# Altium PCB PCB1.PcbDoc
Units mm, origin at the board's own origin, x right, y up, seen from the top; angles counter-clockwise.
Board outline 152.4 x 101.6 mm, 4 copper layers (Top Layer, GND, PWR, Bottom Layer), stack 1.922 mm thick; 32 components, 37 nets, 142 pads, 49 vias.
Unrouted connection lines stored in the file: 17.
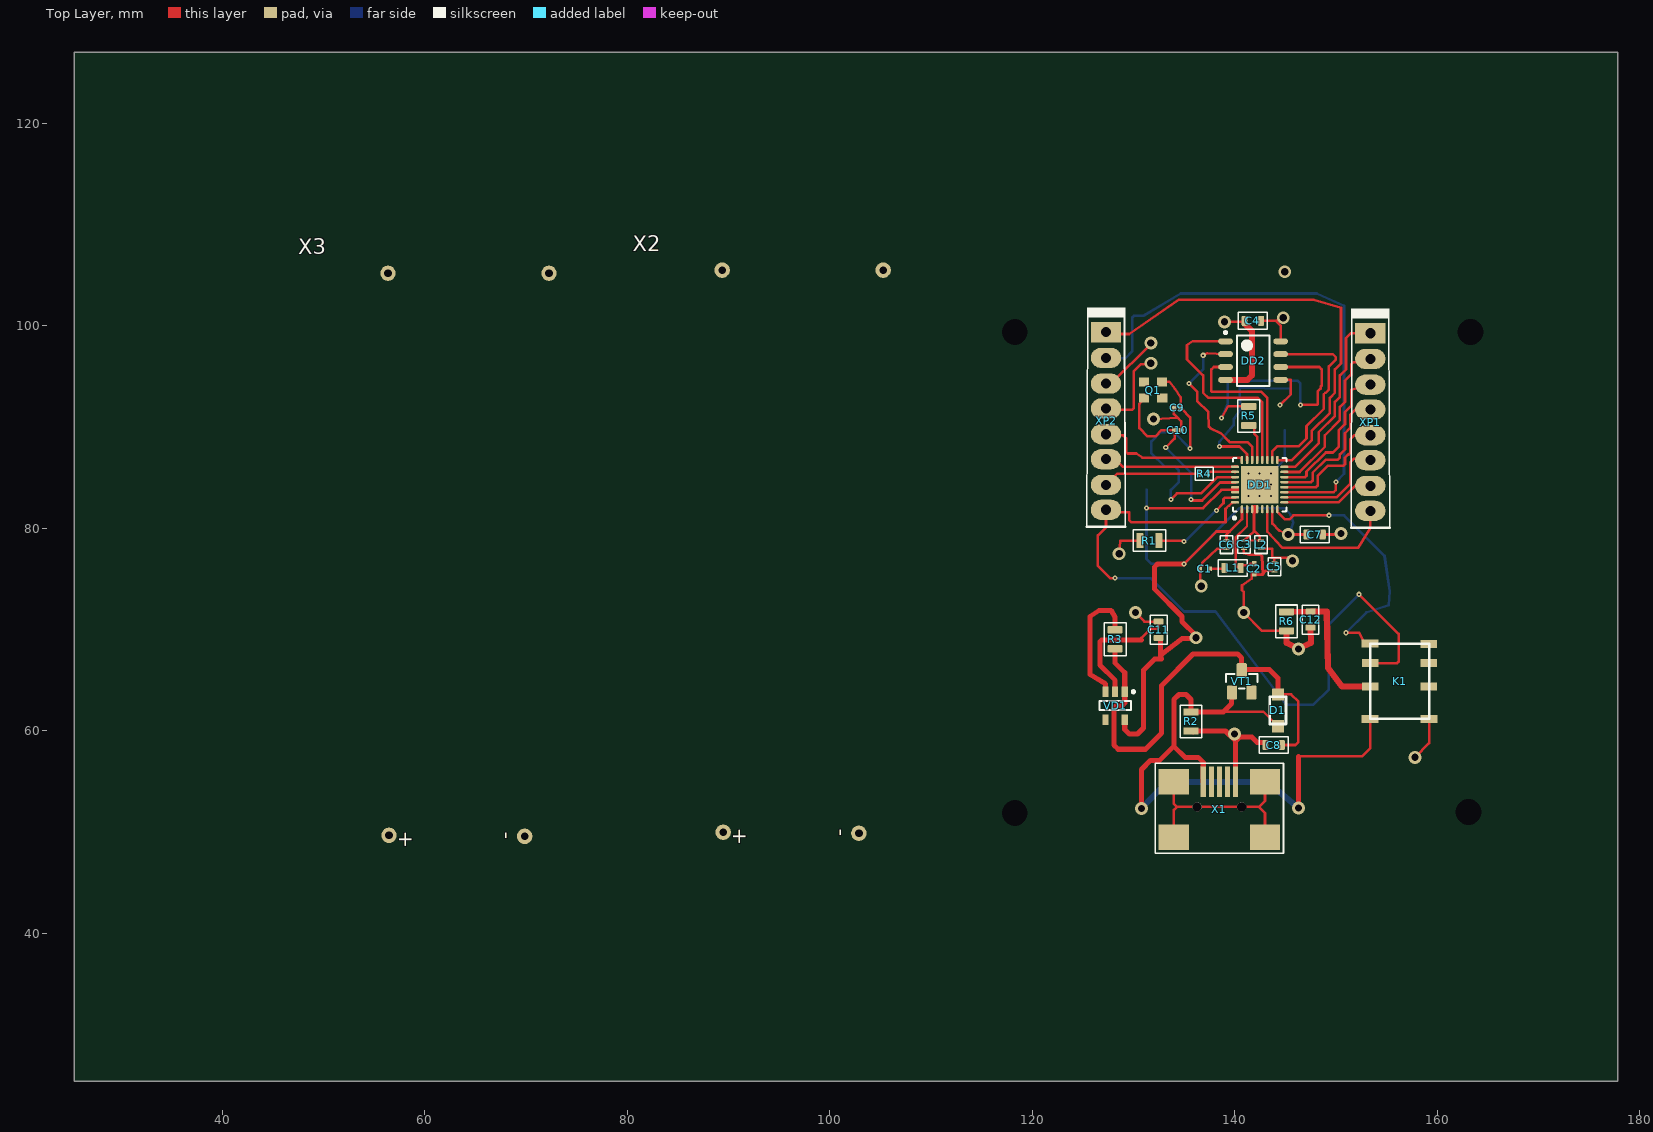
[diagram p0: Top Layer view]
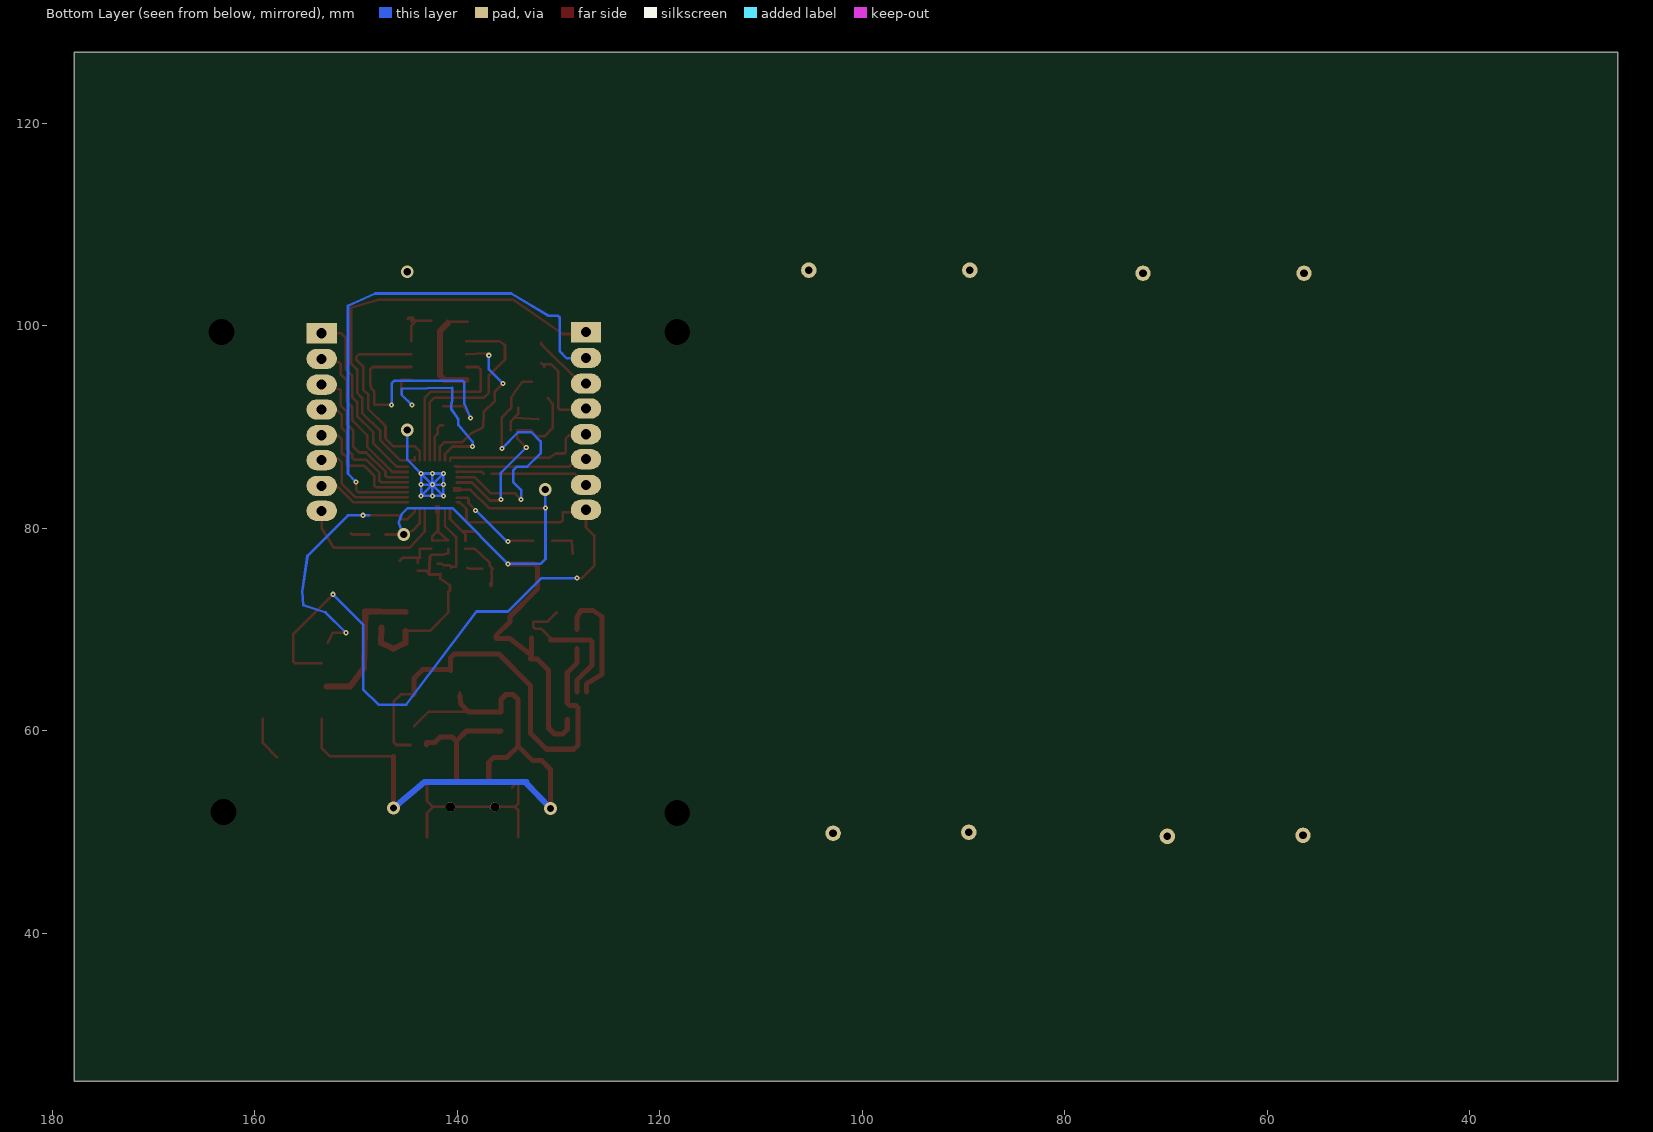
[diagram p1: Bottom Layer view, seen from below]
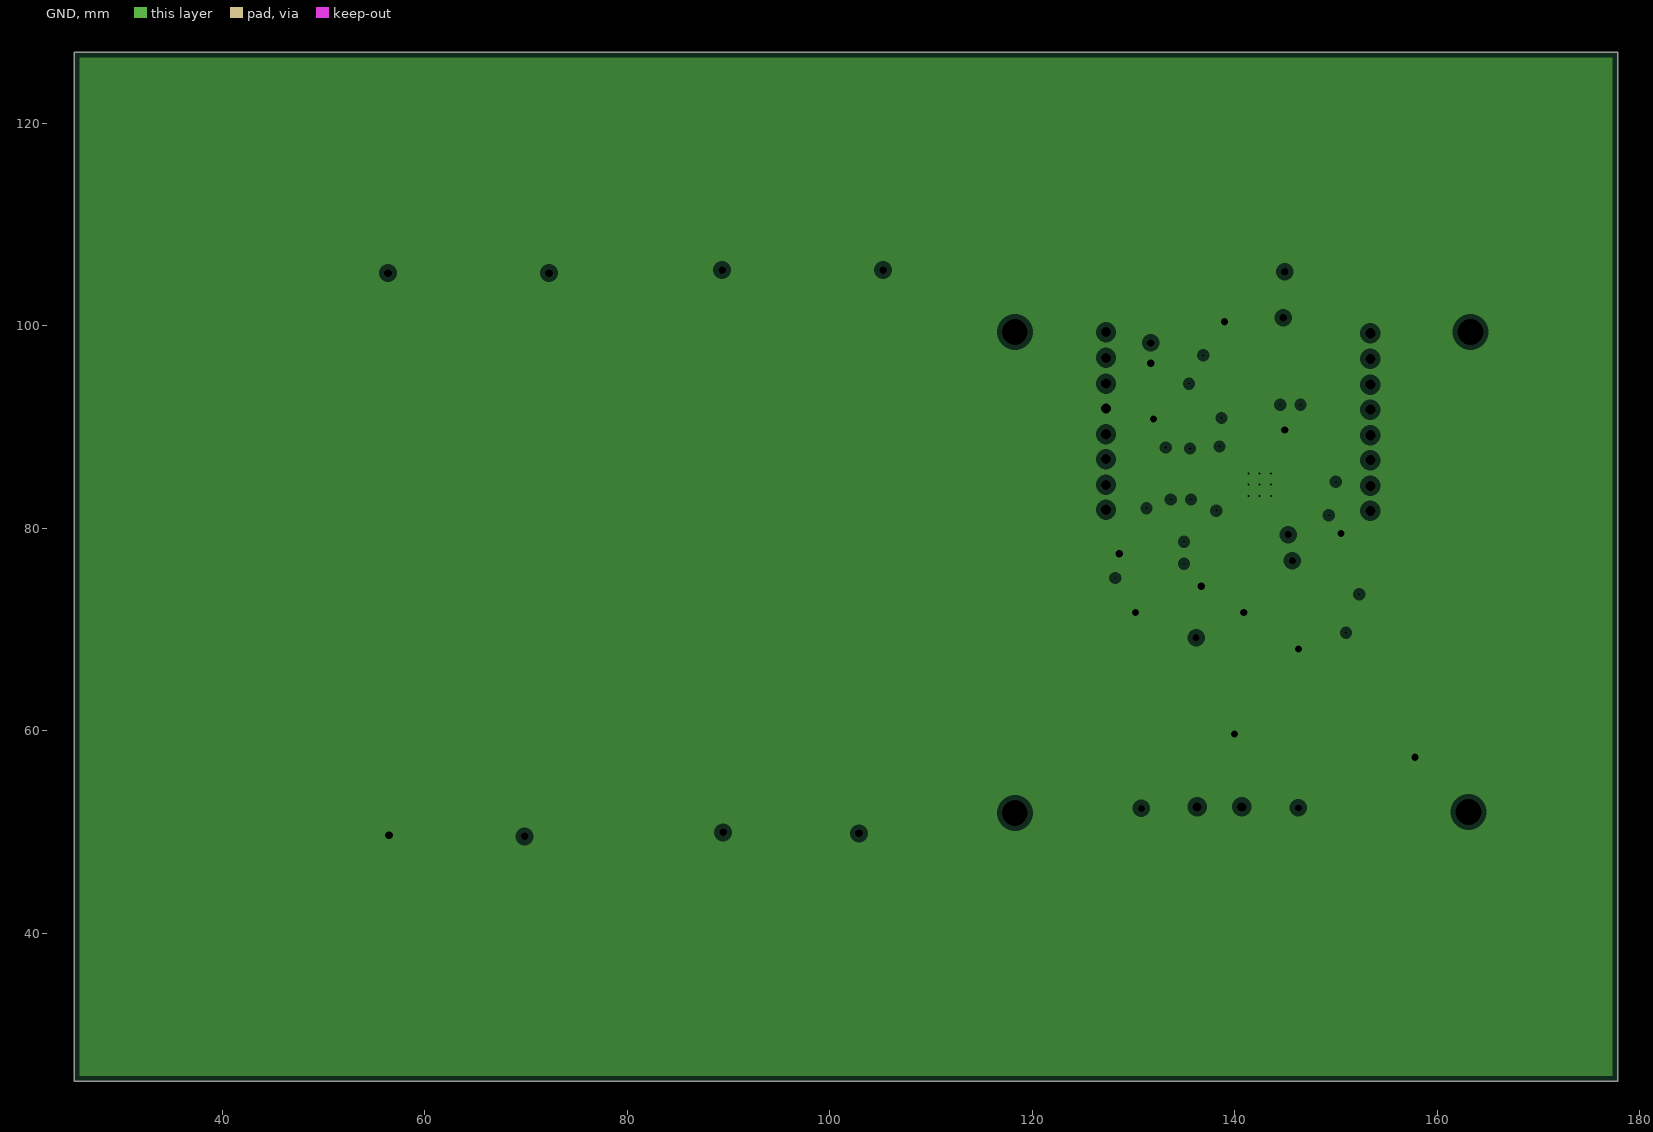
[diagram p2: GND, clearances drawn from the general rule]
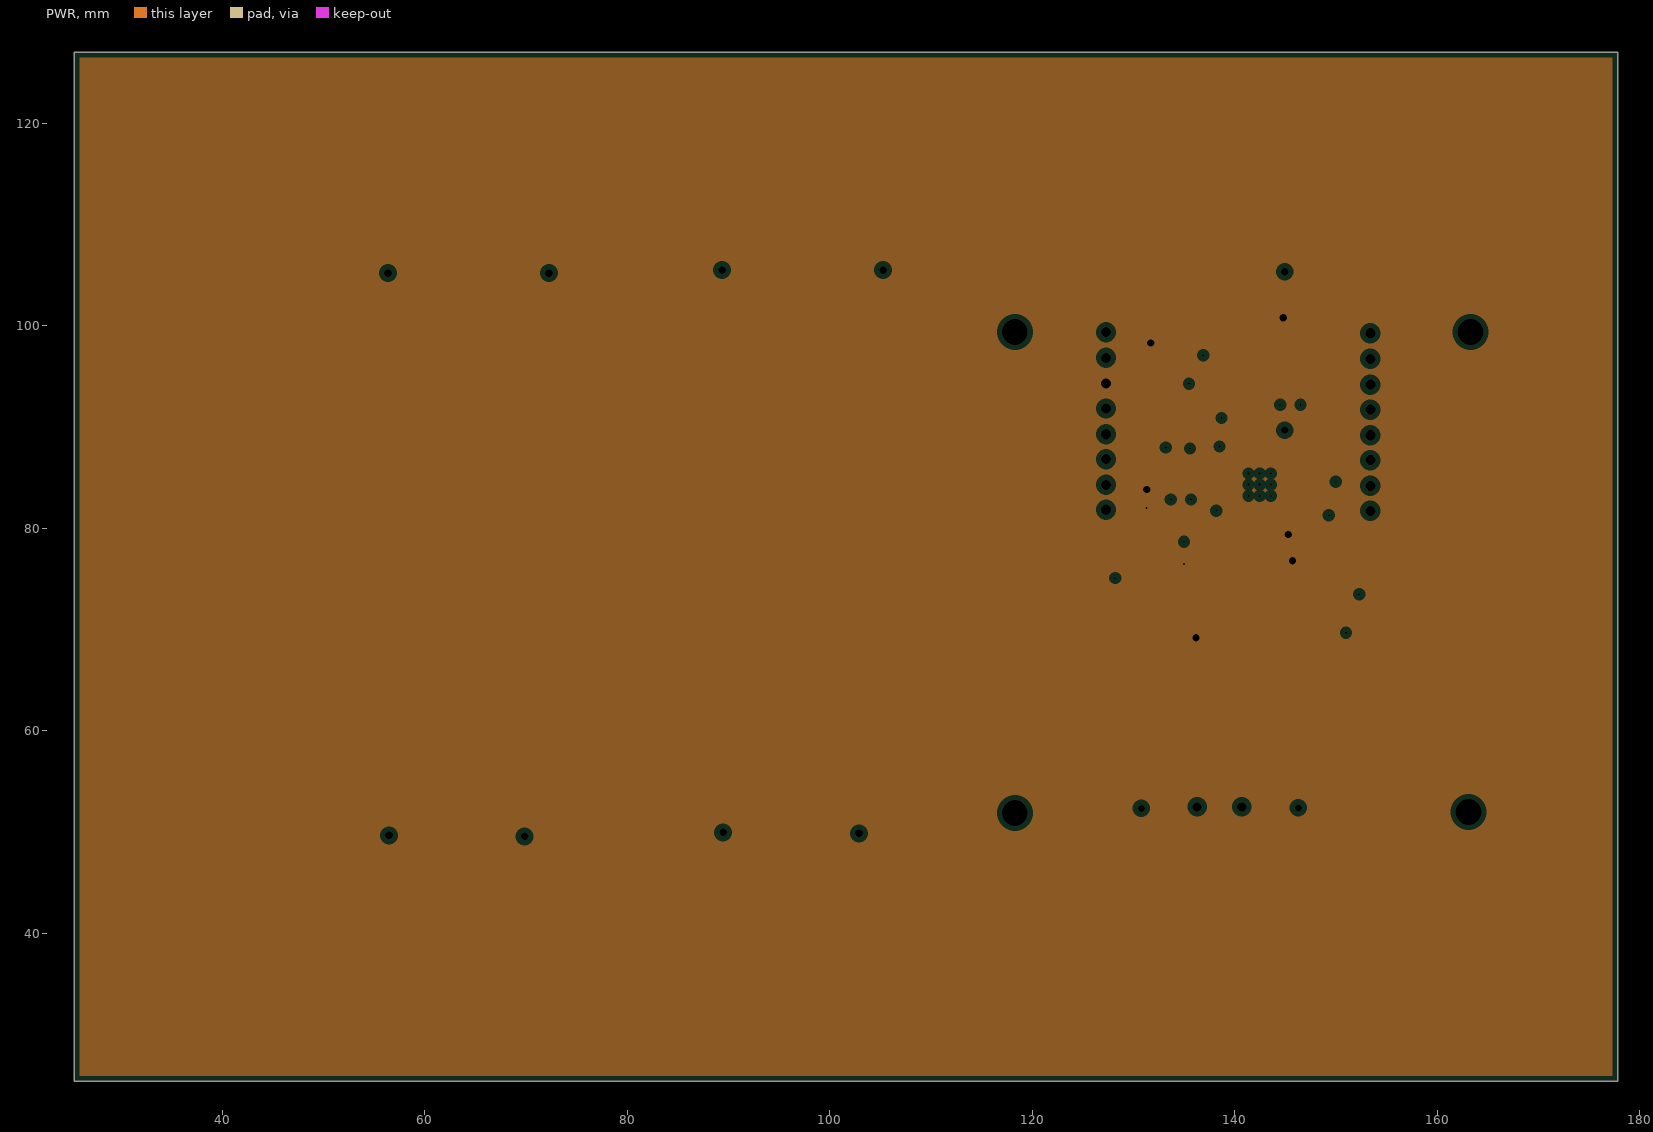
[diagram p3: PWR, clearances drawn from the general rule]

## Layer stack, top to bottom
Top Solder: solder mask 0.0254, SM-001, Dk 4
Top Layer: signal copper 0.105
Dielectric 2: prepreg 0.0711, PP-006, Dk 4.1
GND: plane copper 0.035, net GND
Dielectric 1: dielectric 1.5, FR-4, Dk 4.8
PWR: plane copper 0.035, net 3,3B
Dielectric 3: prepreg 0.0711, PP-006, Dk 4.1
Bottom Layer: signal copper 0.105
Bottom Solder: solder mask 0.0254, SM-001, Dk 4

## Board outline
25.4,25.4 177.8,25.4 177.8,127 25.4,127

## Design rules (kind name [scope] priority, off if disabled: settings)
Clearance [All] p1: gap=0.05 ignorepadtopadclearanceinfootprint=TRUE
DiffPairsRouting [All] p1: maxlimit=0.254 minlimit=0.1 mostfreqgap=0.254 toplayer_prefgap=0.1 toplayer_minwidth=0.25 toplayer_maxwidth=0.381 toplayer_prefwidth=0.25 bottomlayer_minwidth=0.25 bottomlayer_maxwidth=0.381 bottomlayer_prefwidth=0.25 maxuncoupledlength=12.7
HoleToHoleClearance [All] p1: gap=0.127 allowstackedmicrovias=TRUE
MinimumSolderMaskSliver [All] p1: minsoldermaskwidth=0.05
PlaneClearance [All] p1 off: clearance=0.508
PlaneConnect [All] p1 off: planeconnectstyle=Relief reliefexpansion=0.508 reliefentries=4 reliefconductorwidth=0.254 reliefairgap=0.254
PolygonConnect [All] p1 off: connectstyle=Relief reliefconductorwidth=0.254 reliefentries=4 polygonreliefangle="90 Angle" airgapwidth=0.254
RoutingVias [All] p1 off: holewidth=0.711 width=1.27 viastyle="Through Hole" minholewidth=0.711 minwidth=1.27 maxholewidth=0.711 maxwidth=1.27
ShortCircuit [All] p1: allowed=TRUE
SilkToSilkClearance [All] p1: silktosilkclearance=0.1
SilkToSolderMaskClearance [IsText] p1: minsilkscreentomaskgap=0.1 clearancetoexposedcopper=TRUE
SolderMaskExpansion [All] p1: expansion=0.05 istentingtop=FALSE soldermaskfromhole=TRUE
UnRoutedNet [All] p1: checkbadconnections=TRUE
Width [All] p1: maxlimit=0.6 minlimit=0.1 preferedwidth=0.25 minimp=50.000000 maximp=50.000000 favimp=50.000000
21 further rules are at their usual default settings.

## Classes and differential pairs
differential pair UART: +UART_P -UART_N

## Components (designator, comment, footprint, x,y, rotation, side; value= is the part's Value field where it differs from the comment)
C1 "3пФ" "0201 C0G 7пФ 25В"#1 137,76 r180 top
C4 "10мкФ" "FB 0603" 141.774,100.484 r0 top
C5 "0,1мкФ" "RES 0402"#1 143.9,76.2 r270 top
C6 "100нФ" "RES 0402"#2 139.174,78.384 r270 top
C8 "10мкФ" "FB 0603" 143.825,58.6 r0 top
C9 "7пкФ" "0201 C0G 7пФ 25В"#2 134.304,91.884 r0 top
C10 "7пкФ" "0201 C0G 7пФ 25В"#2 134.374,89.684 r180 top
D1 "" MBR120 143.65,64.125 r270 top
DD1 "esp8266ex" ESP8266 142.449,84.309 r90 top
DD2 "M25P16-VMN6TP" SOIC-8(3.90мм) 141.799,96.559 r0 top
K1 "gost relay" RELE 159.174,61.184 r90 top
L1 "2,2нГ" "FB 0603" 139.774,76.084 r0 top
L2 "4,3нГ" "RES 0402"#1 142.574,78.384 r270 top
Q1 "26МГц" SMD02520C4 131.925,93.6 r0 top
R1 "12k" "RES 0805" 131.574,78.784 r180 top
R2 "10k" "RES 0805" 135.674,60.934 r270 top
R3 "2K" "RES 0805" 128.174,69.059 r270 top
R4 "499К" "RES 0402"#1 136.974,85.384 r180 top
R5 "200Ом" "RES 0805" 141.374,91.084 r90 top
R6 "2K" "RES 0805" 145.1,70.8 r90 top
VD1 "ap2112" 2112 128.174,62.484 r270 top
VT1 "" SOT23-3 140.674,64.984 r0 top
X1 "usb_micro" USB_mini_B 138.474,46.584 r180 top
X2 "battery_x2" Battery_x2AA 89.374,105.484 r270 top
X3 "battery_x2" Battery_x2AA 56.374,105.184 r270 top
XP1 "PLD-8" PLD-8 153.374,86.724 r270 top
XP2 "PLD-8" PLD-8 127.274,86.824 r270 top
С2 "2,4пФ" "0201 C0G 7пФ 25В"#1 141.9,76 r270 top
С3 "0,1мкФ" "RES 0402"#3 140.9,78.4 r270 top
С7 "1мкФ" "FB 0603" 147.874,79.384 r0 top
С11 "10мкФ" "FB 0603" 132.474,69.984 r270 top
С12 "10мкФ" "FB 0603" 147.474,70.984 r90 top

## Footprints (in the part's own frame and the unit in brackets; to place one, negate y for a bottom-side part, rotate by r counter-clockwise, add the part's x,y. Pads: shape width x height; smd on the part's side, far side on the other; paste and mask are expansions set on the pad)
"0201 C0G 7пФ 25В"#1 [mm] "Chip Capacitor, 2-Leads, Body 0,60x0,30mm, IPC Medium Density"
  rect 0.5x0.44 smd: 1(-0.5,0) 2(0.5,0)
  body extent -0.3,-0.15 0.3,0.15, height 0.23
"0201 C0G 7пФ 25В"#2 [mm] "Chip Capacitor, 2-Leads, Body 0,60x0,30mm, IPC Medium Density"
  rect 0.5x0.44 smd: 1(-0.33,0) 2(0.33,0)
  body extent -0.3,-0.15 0.3,0.15, height 0.23
2112 [mm] "SOT23, 5-Leads, Body 3,00x2,85mm, Pitch 0,95mm, IPC Medium Density"
  rect 1.05x0.6 smd: 1(-1.375,0.95) 2(-1.375,0) 3(-1.375,-0.95) 4(1.375,-0.95) 5(1.375,0.95)
  silkscreen extent -1.5,-1.55 0.45,1.93, body extent -0.85,-1.55 0.85,1.55, height 1.1
Battery_x2AA [mil]
  round 60 hole 30: 1(2188.98,531.5) 2(2185.04,3.94) 99(0,625.98) 99(0,0)
  body extent -43,-358 2232,882, height 630
ESP8266 [mm] "QFN, 32-Leads, Body 5,00x5,00mm, Pitch 0,50mm, Thermal Pad 3,70x3,70mm, IPC Medium Density"
  oval 0.8x0.25 smd: 1(-2.425,1.75) 2(-2.425,1.25) 3(-2.425,0.75) 4(-2.425,0.25) 5(-2.425,-0.25) 6(-2.425,-0.75) 7(-2.425,-1.25) 8(-2.425,-1.75) 17(2.425,-1.75) 18(2.425,-1.25) 19(2.425,-0.75) 20(2.425,-0.25) 21(2.425,0.25) 22(2.425,0.75) 23(2.425,1.25) 24(2.425,1.75)
  oval 0.25x0.8 smd: 9(-1.75,-2.425) 10(-1.25,-2.425) 11(-0.75,-2.425) 12(-0.25,-2.425) 13(0.25,-2.425) 14(0.75,-2.425) 15(1.25,-2.425) 16(1.75,-2.425) 25(1.75,2.425) 26(1.25,2.425) 27(0.75,2.425) 28(0.25,2.425) 29(-0.25,2.425) 30(-0.75,2.425) 31(-1.25,2.425) 32(-1.75,2.425)
  rect 3.7x3.7 smd: 33(0,0)
  silkscreen extent -3.42,-2.65 2.65,2.65, body extent -2.5,-2.5 2.5,2.5, height 0.7
"FB 0603" [mm]
  rrect35% 0.6x1 smd: 1(-0.8,0) 2(0.8,0)
  silkscreen extent -1.43,-0.82 1.43,0.82, body extent -0.8,-0.43 0.8,0.43, height 0.9
MBR120 [mm]
  rect 1.2x1.2 smd: 1(0.525,0.6) 2(3.675,0.6)
  silkscreen extent 0.75,-0.2 3.45,1.4, body extent 0.4,-0.32 3.4,1.48, height 0.25
PLD-8 [mm]
  rect 2x3 hole 1: 1(-12.54,0)
  oval 2x3 hole 1: 2(-10,0) 3(-7.46,0) 4(-5,0) 5(-2.46,0) 6(0,0) 7(2.54,0) 8(5,0)
  silkscreen extent -14.97,-1.9 6.67,1.91, body extent -13.81,-1.28 6.36,1.25, height 8.5
RELE [mm]
  rect 0.8x1.65 smd: 1(0,5.825) 2(3.2,5.8) 3(5.5,5.8) 4(7.425,5.825) 5(7.399,0.026) 6(5.499,0.026) 7(3.199,0.026) 8(0,0)
  silkscreen extent 0,0 7.42,5.82, body extent -1.3,-0.35 8.7,6.15, height 5.65
"RES 0402"#1 [mm]
  rect 0.3x0.6 smd: 1(-0.4,0) 2(0.4,0)
  silkscreen extent -0.87,-0.63 0.87,0.63, body extent -0.5,-0.25 0.5,0.25, height 0.35
"RES 0402"#2 [mm]
  rect 0.3x0.6 smd: 1(-0.4,0)
  rect 0.3x0.6 smd paste+0: 2(0.4,0)
  silkscreen extent -0.87,-0.63 0.87,0.63, body extent -0.5,-0.25 0.5,0.25, height 0.35
"RES 0402"#3 [mm]
  rect 0.3x0.6 smd: 1(-0.4,0)
  rect 0.3x0.6 smd mask+0.1: 2(0.4,0)
  silkscreen extent -0.87,-0.63 0.87,0.63, body extent -0.5,-0.25 0.5,0.25, height 0.35
"RES 0805" [mm]
  rrect25% 0.7x1.5 smd: 1(-0.925,0) 2(0.95,0)
  silkscreen extent -1.6,-1.07 1.63,1.07, body extent -1.05,-0.7 1.05,0.7, height 0.5
SMD02520C4 [mm]
  rect 1x0.9 smd: 1(-0.9,-0.75) 2(0.9,-0.75) 3(0.875,0.85) 4(-0.9,0.85)
  body extent -1.25,-1 1.25,1, height 1
SOIC-8(3.90мм) [mm] "SOIC, 8-Leads, Body 4,90x3,90mm, Pitch 1,27mm, IPC Medium Density"
  oval 1.45x0.6 smd: 1(-2.725,1.905) 2(-2.725,0.635) 3(-2.725,-0.635) 4(-2.725,-1.905) 5(2.725,-1.905) 6(2.725,-0.635) 7(2.725,0.635) 8(2.725,1.905)
  silkscreen extent -2.85,-2.5 1.6,2.88, body extent -2,-2.5 2,2.5, height 1.75
SOT23-3 [mm]
  rrect25% 1x1.4 smd: 1(-0.95,-1.2) 2(0.95,-1.2) 3(0,1)
  silkscreen extent -1.54,-0.8 1.57,0.65, body extent -1.5,-1.25 1.5,1.05, height 1.1
USB_mini_B [mm]
  rect 3x2.5 smd paste-2: 0(-4.5,-2.9) 0(-4.5,-8.4) 0(4.5,-2.9) 0(4.5,-8.4)
  rect 0.5x3 smd: 1(1.6,-8.4) 2(0.8,-8.4) 3(0,-8.4) 4(-0.8,-8.4) 5(-1.6,-8.4)
  round 0.9 hole 0.9 unplated mask+0: H(-2.2,-5.9) H(2.2,-5.9)
  silkscreen extent -6.32,-10.23 6.32,-1.33, body extent -5.35,-9.2 5.35,0, height 3.95

## Part data
C1 C9 C10 С2: library part "0201 cap", Link=https://www.chipdip.ru/product/grm0335c1e7r0bd01d, Емкость=7пФ, Корпус="smd 0201", Напряжение=25
C4 C8 С11 С12: library part GRM188R60G106ME47D, ComponentLink1Description="New link", ComponentLink1URL=https://www.chipdip.ru/product/grm188r60g106me47d, Напряжение=4В, Номинал=10мкФ
C5 C6 С3: library part GRM152C80G104KE19D, ComponentLink1Description="New link", ComponentLink1URL=https://www.chipdip.ru/product/grm152c80g104ke19d, Номинал=100nF
D1: library part MBR120, I=1.0A, Name=MBR120VLSF, V=20V
L1: library part LQW18AN2N2D, Link=https://www.chipdip.ru/product/lqw18an2n2d, Номинал="2.2 нГн"
L2: library part LQP15MN4N3B02D, ComponentLink1Description="New link", ComponentLink1URL=https://www.chipdip.ru/product/lqp15mn4n3b02d, Nom=4.3nH
Q1: library part LBY001XRA001, freequency=26MHz, Korpus=SMD02520C4, Link=https://www.chipdip.ru/product0/8024602401, precission=10ppm
R1 R2 R3 R5 R6: library part "RES 0805"
R4: library part "RES 0402"
VT1: library part SI2325DS-T1-GE3, "N-MOSFET", Continuous drain current=530mA, Gate-to-source voltage=(+-)20B, Manufacturer=IXYS, Power dissipation=750W, id=mosfert31, Part Number=SI2325DS-T1-GE3, Rds=1,2Ohm, Structure=p-channel, Total gate charge=7,7nC, V drain-source max=150B
XP1 XP2: "PLD connector", Manufacturer=NONAME, Connector type="Вилка на плату", Number of contacts=8, Type="Разъем штыревой"
С7: library part "CC0603KRX7R5BB105 1мкФ"
DD2: Link=https://www.chipdip.ru/product/m25p16-vmn6tp-tr, Max freequency="75 MHz", VCC=2.7…3.6V
K1: ComponentLink1Description="New link", ComponentLink1URL=https://www.chipdip.ru/product/hfd4-5sr-im03gr, Name="HFD4/5S(R) (IM03GR)"
VD1: Iout=600, Name=AP2112, Vdrop=1300mV
X2 X3: ComponentLink1Description="New link", ComponentLink1URL=https://www.chipdip.ru/product0/8008602593, Name=BH2AAPC-4-12MM

## Free pads (board coordinates)
  round 1.524 hole 2.54: 3(118.274,51.884) 4(163.074,51.984) 5(163.274,99.384) 6(118.274,99.384)

## Via types
v1: diameter 0.5, hole 0.2, Top Layer to Bottom Layer, 28 vias
v2: diameter 1.27, hole 0.711, Top Layer to GND, 11 vias
v3: diameter 1.27, hole 0.711, Top Layer to Bottom Layer, 4 vias
v4: diameter 1.27, hole 0.711, Top Layer to PWR, 4 vias
v5: diameter 1.27, hole 0.711, GND to Bottom Layer, 1 vias
v6: diameter 1.27, hole 0.711, PWR to Bottom Layer, 1 vias

## Nets (pads, with @x,y where several pads share a name; then routed paths per layer and width w, separated by ;. In a path a pad name is that pad's centre, name@x,y a point inside that pad or via, vN(x,y) a via of type N, cw(c..) or ccw(c..) an arc to the next point about the centre after c; other vN are vias at no path point)
3,3B: C4.2 C5.1 C6.1 DD1.1 DD1.7 DD1.29 DD1.30 DD2.8 L2.2 VD1.5 XP2.3 С7.1 С11.2 | length 95.4
  Top Layer w0.25: XP2.3 127.784,94.284 131.7,98.2 v4(131.7,98.3) ; C4.2 144.051,100.484 ; C5.1 143.9,77.084 ; DD2.8 144.524,100.007 144.197,100.334 144.197,100.338 144.051,100.484 ; v4(144.774,100.784) 144.097,100.484 144.051,100.484
  Top Layer w0.254: v1(131.274,81.984) 136.874,81.984 138.674,83.784 139.974,83.784 ; v1(134.974,76.484) 138.174,79.684 139.474,79.684 ; v4(136.174,69.184) v4@136.174,69.384 ; C6.1 139.174,79.384 139.474,79.684 ; DD1.1 140.699,80.909 139.474,79.684 ; L2.2 143.674,77.984 143.674,77.107 143.651,77.084 143.9,77.084 145.374,77.084 v4(145.674,76.784) ; DD1.7 143.699,80.459 144.374,79.784 v3(145.274,79.384) С7.1
  Top Layer w0.5: VD1.5 129.124,60.134 129.574,59.684 130.374,59.684 130.974,60.284 130.974,65.984 132.074,67.084 132.774,67.084 132.674,67.484 ; С11.2@132.674,69.184 132.674,67.484 ; v1(134.974,76.484) 132.367,76.484 132.074,76.191 132.074,73.984 134.774,71.284 134.774,70.784 v4@136.174,69.384 ; v4(136.174,69.184) 136.089,69.099 134.789,69.099 132.674,67.484
  Bottom Layer w0.25: XP2.3 XP2.3@128.184,94.284 ; v1(131.274,81.984) 131.287,81.997 131.287,83.812 v6(131.3,83.825)
  Bottom Layer w0.254: v1(131.274,81.984) 131.274,76.984 131.774,76.484 v1(134.974,76.484) 140.474,81.984 144.874,81.984 145.474,81.384 145.774,80.584 v3@145.374,79.384
CLK: DD1.21 R5.1 | length 3.9
  Top Layer w0.254: R5.1 141.686,90.159 141.91,89.936 141.91,89.349 142.199,89.059 DD1.21
GND: C1.2 C4.1 C5.2 C6.2 C8.1 C9.1 C10.1 DD1.33 DD2.4 K1.8 R1.2 R2.2 R6.1 VD1.2 X1.5 X3.2 XP2.4 С2.2 С3.2 С7.2 С11.1 С12.1 | length 102.9
  Top Layer w0.25: XP2.4 XP2.4@127.287,91.725 ; XP2.4@127.774,91.824 XP2.4@127.287,91.725 ; v2@131.338,95.996 131.363,95.996 v2@131.404,95.954 ; v2(131.7,96.3) 131.59,96.19 130.69,96.19 130,95.5 130,91.846 129.854,91.7 XP2.4@127.287,91.725 ; C1.2 136.587,75.913 136.587,74.371 v2(136.674,74.284) ; C1.2@136.625,76.125 136.8,76.3 136.8,76.6 138.284,77.984 C6.2 ; v2(138.974,100.384) 140.874,100.384 C4.1 ; v2(140.874,71.684) 142.683,69.875 R6.1
  Top Layer w0.254: 126.674,68.835 126.823,68.984 ; v2(128.574,77.484) 128.674,78.784 R1.2 ; v2(130.174,71.684) 131.074,70.784 С11.1 132.474,70.249 132.325,70.1 131.7,70.1 130.774,69.174 130.774,68.984 ; v2(131.974,90.784) 134.339,90.919 ; C9.1 133.974,91.284 134.339,90.919 ; C10.1 134.704,90.554 134.339,90.919 ; R2.2 R2.2@135.897,59.761 ; v2(136.674,74.284) v2@136.744,74.554 ; v2(140.874,71.684) 140.874,73.714 140.704,73.884 140.704,74.354 141.674,75.044 141.674,75.484 141.725,75.433 142.774,75.433 ; С3.2@140.874,77.984 140.874,77.533 141.423,77.384 142.525,77.384 142.674,77.235 142.774,75.433 ; C4.1@140.974,100.184 C4.1@140.974,100.384 ; C5.2 143.007,75.8 142.774,75.433 ; С12.1@147.301,70.011 С12.1 ; С12.1@147.443,70.122 147.475,70.153 С12.1@147.48,70.159 ; С7.2 150.374,79.384 v2(150.474,79.484) ; v2(157.774,57.384) 159.174,58.784 K1.8
  Top Layer w0.5: 126.674,68.835 126.674,66.484 128.174,64.984 VD1.2 ; 126.823,68.984 130.774,68.984 ; R2.2 139.074,59.984 140.074,58.984 ; X1.5 140.074,58.984 ; 140.074,58.984 140.474,59.384 141.674,59.384 142.208,58.85 C8.1@142.975,58.85 ; C8.1@142.975,58.85 143.025,58.8 C8.1 C8.1@142.975,58.85
  Top Layer w0.6: DD2.4 141.244,94.654 141.674,95.084 141.674,99.484 C4.1@140.974,100.184 ; R6.1 145.1,68.7 v2(146.274,68.084) 147.5,68.7 147.475,70.153 С12.1
  Bottom Layer w0.25: v1(142.449,84.309) v1(141.349,84.309) ; v1(143.549,84.309) v1(143.549,83.209) v1(142.449,83.209) v1(141.349,83.209) v1(141.349,84.309) ; v5(144.925,89.7) 144.925,86.785 v1(143.549,85.409) v1(142.449,85.409) v1(141.349,85.409) v1(141.349,84.309)
  other v2: 139.974,59.684
HOLD: DD1.18 DD2.7 | length 19.6
  Top Layer w0.254: DD1.18 143.699,87.609 144.174,88.084 146.274,88.084 147.074,88.884 147.074,90.084 148.774,91.784 148.774,93.235 148.923,93.384 148.974,93.384 149.274,93.684 149.274,95.984 149.969,96.679 149.969,96.889 149.664,97.194 DD2.7
IO0: DD1.15 XP1.2 | length 15.9
  Top Layer w0.254: DD1.15 146.399,85.559 148.874,88.034 148.874,89.184 150.374,90.684 150.374,91.984 150.874,92.484 150.874,94.584 151.474,95.184 151.474,96.184 151.68,96.39 XP1.2@153.04,96.39
IO2: DD1.14 XP1.3 | length 14.9
  Top Layer w0.254: DD1.14 146.925,85.059 147.074,85.208 147.074,85.584 148.974,87.484 149.674,87.484 150.274,88.084 150.274,89.684 150.874,90.284 150.874,91.484 151.474,92.084 151.474,93.684 XP1.3
IO4: DD1.16 XP1.1 | length 18.5
  Top Layer w0.254: DD1.16 145.949,86.059 148.274,88.384 148.274,89.484 149.874,91.084 149.874,92.484 150.374,92.984 150.374,95.084 150.974,95.684 150.974,98.784 151.454,99.264 XP1.1
IO5: DD1.24 XP2.5 | length 15.4
  Top Layer w0.254: XP2.5 127.374,89.184 128.974,89.184 129.274,88.884 129.274,87.533 129.423,87.384 130.274,87.384 130.874,86.984 139.074,86.984 139.474,86.984 DD1.24@140.697,86.984 ; DD1.24@140.696,86.943 140.698,86.941 DD1.24@140.698,86.693
IO12: DD1.10 XP1.6 | length 11.5
  Top Layer w0.254: DD1.10 150.049,83.059 151.374,84.384 151.374,86.484 151.774,86.884 XP1.6@153.574,86.884
IO13: DD1.12 XP1.5 | length 12.4
  Top Layer w0.254: DD1.12 148.025,84.059 148.174,84.208 148.174,85.184 149.174,86.184 150.725,86.184 150.874,86.333 150.874,86.984 151.174,87.284 151.225,87.284 151.374,87.433 151.374,88.784 151.774,89.184 XP1.5@152.374,89.184
  Bottom Layer w0.254: XP1.5 XP1.5@154.115,89.925
IO14: DD1.9 XP1.7 | length 9.2
  Top Layer w0.254: DD1.9 150.249,82.559 151.874,84.184 XP1.7
IO15: DD1.13 XP1.4 | length 13.8
  Top Layer w0.254: DD1.13 147.525,84.559 147.674,84.708 147.674,85.484 148.974,86.784 150.174,86.784 150.374,86.984 150.374,87.284 150.874,87.784 150.874,89.384 151.374,89.884 151.374,91.184 151.914,91.724 XP1.4
Net*_IN: C1.1 L1.1 | length 1.6
  Top Layer w0.254: C1.1@137.589,75.999 C1.1 138.844,75.984 138.959,76.099 L1.1
NetC8_2: C8.2 D1.1 R3.2 VD1.1 VT1.3 | length 45.2
  Top Layer w0.25: D1.1 145.55,63.6 146.275,62.875 146.275,58.9 145.975,58.6 C8.2
  Top Layer w0.254: VT1.3 140.674,65.909 140.697,65.917 VT1.3@141.047,66.036
  Top Layer w0.5: R3.2 128.174,66.684 129.124,65.734 VD1.1 129.124,62.734 128.874,62.484 128.274,62.484 128.074,62.284 128.074,58.584 128.474,58.184 131.174,58.184 132.774,59.784 132.774,64.484 135.874,67.584 140.274,67.584 140.674,67.184 VT1.3 ; VT1.3@141.047,66.036 143.414,66.036 144.25,65.2 D1.1
NetC9_2: C9.2 DD1.27 Q1.3 | length 28.2
  Top Layer w0.254: Q1.3@132.624,94.484 133.525,94.475 134.075,93.775 134.634,92.924 C9.2 134.664,91.884 134.757,91.791 134.757,91.761 135.574,90.944 v1(135.574,87.884) ; v1(133.673,82.843) 134.273,83.443 136.673,83.443 138.248,85.018 DD1.27@140.023,85.018
  Bottom Layer w0.254: v1@133.674,82.884 133.674,83.784 134.474,84.584 134.474,85.184 134.474,85.684 134.074,86.084 133.074,86.084 131.723,87.435 131.723,88.584 131.774,88.584 132.674,89.484 133.974,89.484 v1(135.574,87.884)
NetC10_2: C10.2 DD1.28 Q1.1 | length 20.5
  Top Layer w0.254: Q1.1 130.574,92.284 130.574,89.884 131.374,89.084 132.174,89.084 132.774,89.684 C10.2 134.044,88.854 v1(133.174,87.984) ; v1(135.673,82.843) 135.773,82.743 136.773,82.743 138.548,84.518 DD1.28@140.023,84.518
  Bottom Layer w0.254: v1(133.174,87.984) 135.674,85.484 v1@135.674,82.884
NetDD1_2: DD1.2 L1.2 С2.1 | length 8.2
  Top Layer w0.233: L1.2 140.474,76.184 140.174,76.184 140.074,76.284 140.074,79.084 141.199,80.209 DD1.2
  Top Layer w0.25: L1.2 140.574,76.179 140.749,76.354 141.354,76.354 141.5,76.5 С2.1
NetDD1_3: DD1.3 DD1.4 L2.1 С3.1 | length 8.1
  Top Layer w0.254: 141.874,81.784 141.874,81.634 141.874,79.684 С3.1 142.474,78.784 142.474,79.184 141.924,79.734 141.924,81.634 141.949,81.659
NetDD1_26: DD1.26 R4.1 | length 2.8
  Top Layer w0.248: R4.1 137.549,85.559 DD1.26
  Top Layer w0.254: DD1.26@139.998,85.543 DD1.26@140.023,85.518
NetDD1_31: DD1.31 R1.1 | length 9.6
  Top Layer w0.254: R1.1 134.874,78.784 v1(134.974,78.684) ; v1(138.173,81.743) 138.173,81.78 138.873,82.48 138.873,82.869 139.022,83.018 DD1.31@140.023,83.018
  Bottom Layer w0.254: v1(134.974,78.684) 135.074,78.684 v1@138.174,81.784
NetDD2_6: DD2.6 R5.2 | length 26
  Top Layer w0.254: v1(138.674,90.884) 139.324,92.034 R5.2 ; DD2.6 148.334,95.924 148.574,95.684 148.574,94.084 148.474,93.984 148.474,93.784 148.174,93.484 148.174,92.233 148.125,92.184 v1(146.474,92.184)
  Bottom Layer w0.254: v1(138.674,90.884) 139.274,92.284 139.274,94.384 139.474,94.584 146.174,94.584 146.474,94.284 v1(146.474,92.184)
NetK1_3: R6.2 С12.2
NetR3_1: R3.1 VD1.3 | length 12.6
  Top Layer w0.5: VD1.3 127.224,64.634 125.674,65.584 125.674,71.284 126.574,71.884 127.774,71.884 128.174,71.184 R3.1
NetX2_2: X2.2 X3.1
RST: DD1.32 K1.3 XP2.8 | length 72.8
  Top Layer w0.254: v1(128.174,75.084) 127.674,75.084 126.474,76.284 126.474,79.284 127.274,80.084 XP2.8 127.514,81.584 129.574,81.584 129.574,80.784 129.774,80.584 139.074,80.584 139.074,81.924 139.375,82.225 139.419,82.225 139.753,82.559 DD1.32 ; v1(152.274,73.484) 156.174,69.584 156.174,66.833 156.025,66.684 153.574,66.684 K1.3
  Bottom Layer w0.254: v1(128.174,75.084) 131.674,75.084 134.974,71.784 138.074,71.784 145.049,62.584 147.749,62.584 149.274,64.084 149.274,70.484 v1(152.274,73.484)
SCS: DD1.20 DD2.1 | length 21.2
  Top Layer w0.254: DD2.1 137.954,98.464 137.709,98.484 135.849,98.484 135.274,98.084 135.274,96.684 136.874,95.084 136.874,93.384 137.374,92.884 142.274,92.884 142.699,92.459 DD1.20
SDI: DD1.23 DD2.5 | length 21.1
  Top Layer w0.254: v1(138.475,88.075) 140.447,88.075 141.198,87.324 DD1.23@141.198,86.693 ; v1(144.474,92.184) 145.525,93.235 145.525,94.654 DD2.5
  Bottom Layer w0.25: v1(138.475,88.075) 138.475,88.55
  Bottom Layer w0.254: 138.475,88.55 139.874,90.184 139.874,90.784 139.974,90.884 140.574,91.784 140.574,92.184 140.482,92.676 140.482,93.884 145.425,93.784 145.474,93.735 145.474,93.184 v1(144.474,92.184)
SDO: DD1.22 DD2.2 | length 17
  Top Layer w0.254: v1(135.474,94.284) 136.274,93.484 136.274,92.584 137.374,91.484 137.425,90.033 137.574,89.884 138.623,89.384 139.374,88.633 139.523,88.484 141.274,88.484 141.699,88.059 DD1.22 ; v1(136.874,97.084) 137.274,97.284 DD2.2
  Bottom Layer w0.254: v1(135.474,94.284) 136.874,95.684 v1(136.874,97.084)
SLEEP: DD1.8 K1.4 | length 26.1
  Top Layer w0.254: DD1.8 144.199,81.613 144.928,80.884 145.374,80.884 145.774,81.284 v1(149.274,81.284) ; v1(150.974,69.684) 152.274,69.684 K1.4@152.774,68.684
  Bottom Layer w0.254: 148.674,81.284 150.774,81.284 154.774,77.284 155.274,73.784 155.174,72.384 152.974,71.684 v1(150.974,69.684)
TOUT: DD1.6 XP1.8 | length 15.9
  Top Layer w0.254: DD1.6 143.199,79.659 144.674,78.084 152.174,78.084 153.374,79.984 XP1.8
UART_N: R4.2 XP2.7 | length 10.3
  Top Layer w0.248: XP2.7 XP2.7@127.774,84.284
  Top Layer w0.254: XP2.7 128.374,85.384 R4.2
UART_P: DD1.25 XP2.6 | length 13.3
  Top Layer w0.248: XP2.6 128.185,86.824 128.95,86.059 DD1.25 ; DD1.25@139.974,86.109 DD1.25@140.223,86.109
VBAT: VT1.2 X2.1
VCC: D1.2 K1.1 R2.1 VT1.1 X1.1 | length 66.1
  Top Layer w0.25: 138.874,61.884 142.816,61.884 D1.2
  Top Layer w0.254: VT1.1@139.699,63.484 VT1.1 ; 146.274,57.484 152.574,57.484 153.349,58.259 K1.1
  Top Layer w0.5: v3(130.774,52.334) 130.774,56.184 131.674,57.084 132.574,57.084 133.974,58.484 ; R2.1 138.849,61.859 ; R2.1@135.674,61.959 135.674,63.084 135.174,63.584 134.474,63.584 133.974,63.084 133.974,58.484 ; X1.1 136.874,56.884 136.374,57.384 135.074,57.384 133.974,58.484 ; 138.874,61.884 139.674,62.684 VT1.1@139.699,63.484 ; v3@146.274,52.184 146.274,57.484
  Bottom Layer w0.254: 133.174,54.835 133.174,54.935 ; 143.223,54.935 143.374,54.784
  Bottom Layer w0.6: v3(130.774,52.334) 133.174,54.835 ; 133.174,54.935 143.223,54.935 v3(146.274,52.384)
VIO1: DD1.11 XP2.2 | length 51.8
  Top Layer w0.254: DD1.11 149.749,83.559 149.974,83.784 v1(149.974,84.584)
  Bottom Layer w0.254: XP2.2 127.314,96.784 129.174,96.784 129.874,97.484 129.874,100.835 130.023,100.984 130.974,100.984 134.674,103.184 148.074,103.184 150.774,101.984 150.774,85.384 v1(149.974,84.584)
VIO2: DD1.17 XP2.1 | length 43.2
  Top Layer w0.254: XP2.1 127.454,99.184 129.574,99.184 134.474,102.584 147.774,102.584 150.474,101.784 150.474,96.284 149.874,95.684 149.874,93.384 149.374,92.884 149.374,91.384 147.574,89.584 147.574,88.684 145.624,86.734 DD1.17 DD1.17@144.199,87.005
WP: DD1.19 DD2.3 | length 15.6
  Top Layer w0.254: DD2.3 137.914,95.924 137.674,95.684 137.674,93.533 137.723,93.484 142.574,93.484 143.199,92.859 DD1.19
pads on no net: DD1.5 K1.2 K1.5 K1.6 K1.7 Q1.2 Q1.4 VD1.4 X1.0 X1.2 X1.3 X1.4 X1.H X2.99 X3.99
copper on no net: | length 46.7
  Top Layer w0.25: 131.59,96.19 131.7,96.3
  Top Layer w0.254: 133.974,49.484 133.974,52.184 134.274,52.484 ; 134.574,54.384 133.974,54.984 133.974,52.784 134.274,52.484 ; 142.974,50.184 142.974,49.484 142.974,51.884 142.374,52.484 ; 142.974,54.984 142.974,53.084 142.374,52.484 ; 144.323,100.784 144.774,100.784 144.878,100.68 ; 144.499,100.459 144.524,100.434 ; 134.274,52.484 136.274,52.484 140.674,52.484 142.374,52.484
  Top Layer w0.6: 145.1,71.75 147.574,71.784 ; 147.774,71.784 149.074,71.784 149.2,66.2 150.574,64.384 152.874,64.384
  Bottom Layer w0.254: 141.349,83.209 143.549,85.409 143.549,84.309 142.449,84.309 ; 141.349,85.409 143.549,83.209 ; 142.449,83.209 142.449,84.309 ; 142.449,85.409 142.449,84.309
  other v3: 144.925,105.325

## Polygon pours and split planes (outlines as drawn)
GND on GND (split plane): 177.29,25.91 25.91,25.91 25.91,126.49 177.29,126.49
3,3B on PWR (split plane): 177.29,25.91 25.91,25.91 25.91,126.49 177.29,126.49

## Other copper
Top Layer:
  region net 3,3B: 140.424,83.559 140.424,84.059 139.624,84.059 139.624,83.559
  rectangle net NetDD1_3: 141.674,81.484 142.174,82.284

## Text inside footprints (layer, text, board x,y; h text height)
X2: Top Overlay "+" at 90.474,50.43 h1.52 r270; Top Overlay "-" at 100.466,50.33 h1.52 r270
X3: Top Overlay "+" at 57.474,50.13 h1.52 r270; Top Overlay "-" at 67.466,50.03 h1.52 r270